# Altium PCB PcbDoc_JavierLopezIniesta_RodrigoMoratilla.PcbDoc (part 2 of 2)
Units mm, origin at the board's own origin, x right, y up, seen from the top; angles counter-clockwise.
Board outline 50 x 50 mm, 4 copper layers (Top Layer, Int1 (GND), Int2 (PWR), Bottom Layer), stack 1.369 mm thick; 104 components, 112 nets, 568 pads, 286 vias.
Unrouted connection lines stored in the file: 2.
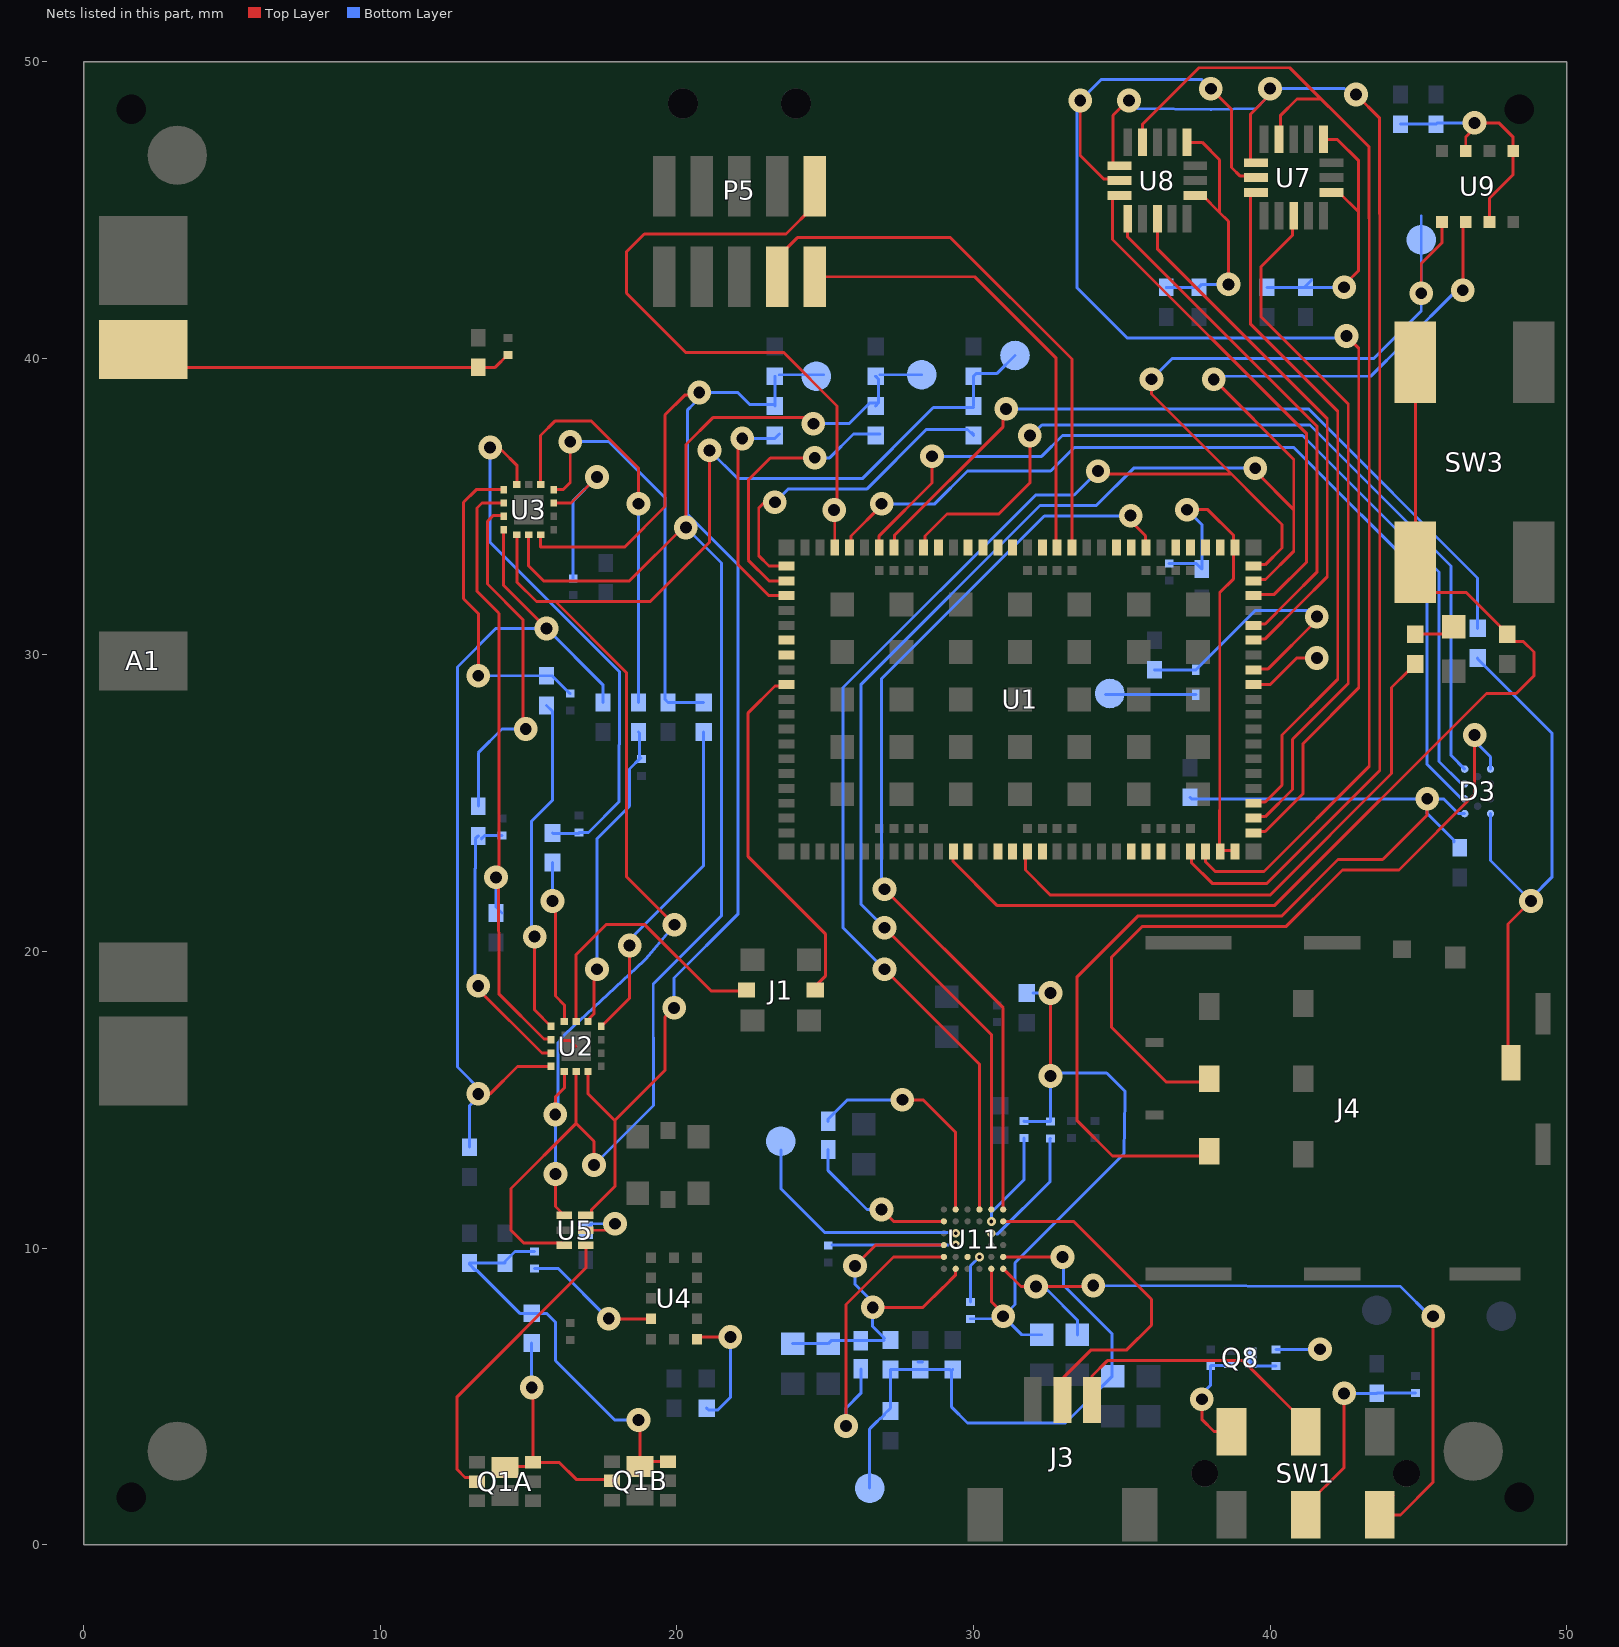
[diagram p4: the nets of this part, all layers, seen from the top]

## Via types
v1: diameter 0.8, hole 0.4, Int2 (PWR) to Bottom Layer, 77 vias
v2: diameter 0.8 (per signal layer), hole 0.4, Top Layer to Int2 (PWR), 59 vias
v3: diameter 0.8, hole 0.4, Top Layer to Int1 (GND), 56 vias
v4: diameter 0.8, hole 0.4, Int1 (GND) to Bottom Layer, 53 vias
v5: diameter 0.8, hole 0.4, Top Layer to Int2 (PWR), 18 vias
v6: diameter 0.3, hole 0.13, Top Layer to Bottom Layer, 10 vias
v7: diameter 0.8, hole 0.4, Top Layer to Bottom Layer, 8 vias
v8: diameter 0.5, hole 0.2, Top Layer to Bottom Layer, 2 vias
v9: diameter 0.8 (per signal layer), hole 0.4, Int1 (GND) to Bottom Layer, 2 vias
v10: diameter 0.3, hole 0.12, Top Layer to Bottom Layer, 1 vias

## Nets (pads, with @x,y where several pads share a name; then routed paths per layer and width w, separated by ;. In a path a pad name is that pad's centre, name@x,y a point inside that pad or via, vN(x,y) a via of type N, cw(c..) or ccw(c..) an arc to the next point about the centre after c; other vN are vias at no path point) (continued)
LTE_RF: J1.1 U2.13 | length 9.2
  Top Layer w0.1: U2.13@16.6,17.645 16.6,18.399 16.6,19.9 17.604,20.904 18.917,20.904 21.146,18.675 J1.1@22.19,18.675
M\R\: R34.1 U11.E4 | length 1.6
  Bottom Layer w0.1: R34.1@29.9,8.185 29.9,9.4 v6(30.2,9.7)
NetA1_2: A1.2 C15.1 L8.2 | length 12.7
  Top Layer w0.1: A1.2@2,40.3 2.6,39.7 12.2,39.7 C15.1@13.3,39.7 13.87,39.7 14.285,40.115 L8.2@14.3,40.115
NetC1_1:  | length 0.5
  Top Layer w0.1: 16.174,17.004 16.396,17.004 16.6,16.8
NetC3_2: C3.2 D1.1 U1.13 | length 9.5
  Top Layer w0.1: U1.13@39.42,29.52 39.92,29.52 41.58,31.18 v7(41.58,31.294)
  Bottom Layer w0.1: C3.2@36.1,29.5 D1.1@37.5,29.5 39.5,31.5 41.586,31.5 41.58,31.494 v7(41.58,31.294)
NetD1_2: D1.2 TP1.1 | length 3
  Bottom Layer w0.1: TP1.1@34.45,28.66 D1.2@37.5,28.66
NetD2_2: D2.2 R11.1 | length 1.2
  Top Layer w0.1: R11.1@44.9,30.7 45.95,30.7 D2.2@46.075,30.825
NetD3_C4: D3.C4 J4.DSW R38.2 | length 18.2
  Top Layer w0.1: J4.DSW@48.025,16.855 48.025,20.925 v2(48.8,21.7)
  Bottom Layer w0.1: R38.2@47,29.9 47,29.875 49.504,27.371 49.504,22.504 48.8,21.8 v2(48.8,21.7) 47.435,23.065 D3.C4@47.435,24.65
  other v1: 48.8,21.7
NetL2_1: L2.1 U4.12 | length 4.5
  Top Layer w0.1: v1(17.7,7.619) 17.719,7.6 U4.12@18.988,7.6 ; U4.12@19.113,7.629 U4.12@19.125,7.617
  Bottom Layer w0.1: L2.1@15.2,9.315 15.985,9.315 17.681,7.619 v1(17.7,7.619)
  other v2: 17.7,7.619
NetQ1A_2: Q1A.2 U5.4 | length 10.2
  Top Layer w0.1: Q1A.2@13.255,2.125 13.119,2.261 12.854,2.261 12.587,2.528 12.587,4.987 16.925,9.325 U5.4@16.925,10.1
NetQ1A_6: Q1A.6 Q1B.2 R8.2 | length 8
  Top Layer w0.1: Q1A.6@14.2,2.6 14.239,2.639 15.009,2.639 Q1A.6@15.145,2.775 ; v1(15.1,5.3) 15.141,5.259 15.141,3.39 15.145,3.386 Q1A.6@15.145,2.775 ; Q1B.2@17.81,2.15 17.76,2.2 16.6,2.2 16.025,2.775 Q1A.6@15.145,2.775
  Bottom Layer w0.1: v1(15.1,5.3) 15.1,5.6 R8.2@15.1,6.8
  other v2: 15.1,5.3
NetQ8_1: Q8.1 R48.2 SW1.4 | length 3.8
  Top Layer w0.1: v5(37.7,4.9) 37.7,4.225 38.109,3.816 38.684,3.816 SW1.4@38.7,3.8
  Bottom Layer w0.1: v5(37.7,4.9) 37.7,5.078 38,5.378 R48.2@38,6.015 38.03,6.045 38.62,6.045 Q8.1@38.65,6.075
  other v1: 37.7,4.9
NetQ8_3: Q8.3 R47.1 | length 1
  Bottom Layer w0.1: Q8.3@39.35,6.3 39.35,6.165 39.5,6.015 R47.1@40.2,6.015
NetR1_1: R1.1 U1.55 | length 7.7
  Top Layer w0.1: v1(22.2,37.3) 22.05,37.15 22.05,33.049 23.099,32 U1.55@23.7,32
  Bottom Layer w0.1: v1(22.2,37.3) 23.3,37.3 R1.1@23.45,37.45
  other v5: 22.2,37.3
NetR2_1: R2.1 U1.54 | length 9.4
  Top Layer w0.1: U1.54@23.7,32.5 23.1,32.5 22.404,33.196 22.404,35.904 23.146,36.646 24.642,36.646 v1(24.646,36.65)
  Bottom Layer w0.1: v1(24.646,36.65) 25.151,36.65 25.951,37.45 R2.1@26.85,37.45
  other v5: 24.646,36.65
NetR3_1: R3.1 U1.53 | length 11.2
  Top Layer w0.1: v1(23.3,35.15) 22.95,35.15 22.758,34.958 22.758,33.343 23.101,33 U1.53@23.7,33
  Bottom Layer w0.1: v1(23.3,35.15) 23.742,35.592 26.398,35.592 28.406,37.6 29.8,37.6 R3.1@30,37.4 ; R3.1@29.948,37.502 29.977,37.473 R3.1@30,37.45
  other v5: 23.3,35.15
NetR7_2: R7.2 U4.3 | length 4.2
  Top Layer w0.1: U4.3@20.675,6.925 20.683,6.917 20.766,7 v1(21.8,7)
  Bottom Layer w0.1: R7.2@21,4.6 21.063,4.537 21.375,4.537 21.8,4.962 v1(21.8,7)
  other v5: 21.8,7
NetU1_2: U1.2 U7.7 U8.7 | length 47
  Top Layer w0.1: v2(33.6,48.7) 33.6,46.845 34.399,46.046 34.879,46.046 U8.7@34.925,46 ; v1(38.004,49.096) 38.008,49.096 38.702,48.402 38.702,46.443 38.999,46.146 39.479,46.146 U7.7@39.525,46.1 ; U1.2@39.44,24 39.486,24.046 39.837,24.046 41.108,25.317 41.108,27.008 42.992,28.892 42.992,40.346 v5(42.579,40.759)
  Bottom Layer w0.1: v1(38.004,49.096) 37.7,49.4 34.3,49.4 v2(33.6,48.7) 33.496,48.596 33.496,42.374 35.174,40.696 42.517,40.696 v5(42.579,40.759)
  other v1: 42.579,40.759 33.6,48.7
  other v2: 38.004,49.096
nRF91_SWDCLK: P5.4 U1.33 | length 18.9
  Top Layer w0.1: P5.4@23.375,42.755 23.375,43.39 24.059,44.074 25.922,44.074 29.227,44.074 33.32,39.981 33.32,33.66 U1.33@33.3,33.64
nRF91_SWDIO: P5.2 U1.34 | length 15.8
  Top Layer w0.1: P5.2@24.645,42.755 30.045,42.755 32.774,40.026 32.774,36.729 32.774,33.97 U1.34@32.774,33.466
P0.00: U1.95
P0.01: U1.96
P0.02: U1.97
P0.03: U1.99 U7.6 U8.6 | length 45.5
  Top Layer w0.1: U8.6@34.925,46.5 34.8,46.5 34.7,46.6 34.7,48.2 35.196,48.696 v1(35.243,48.696) ; U1.99@37.346,23.384 37.346,23.003 38.049,22.3 39.897,22.3 43.7,26.103 43.7,44.87 43.696,44.874 43.696,48.104 v1(42.9,48.9) ; U7.6@39.525,46.6 39.446,46.6 39.346,46.7 39.346,48.246 40,48.9 v2(40,49.1)
  Bottom Layer w0.1: v1(35.243,48.696) 35.511,48.428 35.551,48.427 37.994,48.392 ccw(c38.004,49.096) 38.02,48.392 39.525,48.425 40,48.9 v2(40,49.1) 42.511,49.1 42.711,48.9 v1(42.9,48.9)
  other v1: 40,49.1
  other v2: 35.243,48.696
  other v5: 42.9,48.9
P0.04: U1.100 U7.4 U8.4 | length 40.9
  Top Layer w0.1: U8.4@35.7,47.287 35.7,47.9 37.604,49.804 40.666,49.804 43.342,47.128 43.342,44.727 43.346,44.723 43.346,26.25 39.796,22.7 38.15,22.7 37.816,23.034 U1.100@37.816,23.414 ; U7.4@40.3,47.387 40.346,47.433 40.346,48.187 40.909,48.75 41.674,48.75
P0.06: U1.3 U7.11 | length 23.5
  Top Layer w0.1: U1.3@39.44,24.5 39.486,24.546 39.837,24.546 40.754,25.463 40.754,27.155 42.638,29.039 42.638,38.462 39.7,41.4 39.7,43.1 40.754,44.154 40.754,44.767 U7.11@40.8,44.812
P0.07: U1.4 U7.8 | length 23.3
  Top Layer w0.1: U1.4@39.44,25 39.486,25.046 39.836,25.046 40.4,25.61 40.4,27.301 42.284,29.185 42.284,38.216 39.346,41.154 39.346,45.5 39.446,45.6 U7.8@39.525,45.6
P0.08: U1.15 U8.11 | length 17.8
  Top Layer w0.1: U8.11@36.2,44.712 36.2,43.7 41.93,37.97 41.93,32.639 40.996,31.705 39.837,30.546 39.486,30.546 U1.15@39.44,30.5
P0.09: U1.16 U8.9 | length 17.4
  Top Layer w0.1: U8.9@35.2,44.712 35.2,44.1 41.576,37.724 41.576,32.786 40.642,31.852 39.836,31.046 39.486,31.046 U1.16@39.44,31
P0.10: U1.18 U8.8 | length 17.3
  Top Layer w0.1: U8.8@34.75,45.45 34.741,45.45 34.691,45.4 34.691,44.009 41.222,37.478 41.222,33.122 40.146,32.046 39.486,32.046 U1.18@39.44,32
P0.11: U1.19 U9.3 U11.A5 | length 58.5
  Top Layer w0.1: v2(27,20.8) 30.6,17.2 U11.A5@30.6,11.3 ; v5(38.1,39.296) 40.8,36.596 40.8,34.9 ; U1.19@39.44,32.5 39.486,32.546 39.846,32.546 40.8,33.5 40.8,34.9 ; v1(39.5,36.296) 39.5,36.2 40.8,34.9 ; v2(46.5,42.3) 46.5,44.5 U9.3@46.6,44.6
  Bottom Layer w0.1: v2(27,20.8) 26.2,21.6 26.2,28.999 32.242,35.041 34.141,35.041 35.4,36.3 39.496,36.3 v1(39.5,36.296) ; v5(38.1,39.296) 38.204,39.4 43.4,39.4 44.5,40.5 46.3,42.3 v2(46.5,42.3)
  other v1: 27,20.8 38.1,39.296 46.5,42.3
  other v2: 39.5,36.296
P0.12: TP9.1 U1.20 U9.4 U11.A4 | length 60.3
  Top Layer w0.1: v2(27,19.4) 30.2,16.2 U11.A4@30.2,11.3 ; v1(34.2,36.2) 34.3,36.1 38.7,36.1 ; v1(36,39.3) 36,38.8 38.7,36.1 ; U1.20@39.44,33 39.486,33.046 39.836,33.046 40.4,33.61 40.4,34.4 39.69,35.11 38.7,36.1 ; v2(45.1,42.2) 45.1,43.2 45.8,43.9 U9.4@45.8,44.6
  Bottom Layer w0.1: v2(27,19.4) 25.6,20.8 25.6,28.9 32.096,35.395 33.395,35.395 v1(34.2,36.2) ; v1(36,39.3) 36.7,40 43.499,40 45.1,41.601 v2(45.1,42.2) 45.1,43.2 45.1,44.8
  other v1: 27,19.4 45.1,42.2
  other v5: 34.2,36.2 36,39.3
P0.13/AIN0: U1.23
P0.14/AIN1: U1.24
P0.15/AIN2: U1.25
P0.16/AIN3: U1.26
P0.17/AIN4: U1.28 U11.A6 | length 31.5
  Top Layer w0.1: v2(27,22.1) 31,18.1 U11.A6@31,11.3 ; v7(35.3,34.7) 35.3,34.519 35.8,34.019 U1.28@35.8,33.64
  Bottom Layer w0.1: v2(27,22.1) 26.9,22.2 26.9,29.199 32.389,34.687 35.288,34.687 v7(35.3,34.7)
  other v1: 27,22.1
P0.18/AIN5: U1.29
P0.19/AIN6: U1.30
P0.20/AIN7: U1.35
P0.21: U1.37
P0.22: U1.38
P0.23: U1.39
P0.24: U1.40
P0.25: U1.42
P0.26: R12.2 SW3.1 U1.83 | length 37
  Top Layer w0.1: U1.83@29.316,23.414 29.316,23.034 30.804,21.546 40.144,21.546 47.298,28.7 48.3,28.7 48.9,29.3 48.9,30.1 48.55,30.45 48.225,30.45 48,30.675 R12.2@48,30.7 48,30.725 46.625,32.1 45.245,32.1 44.9,32.445 SW3.1@44.9,33.125 SW3.1@44.9,39.875
P0.27: U1.84
P0.28: U1.86
P0.29: U1.87
P0.30: R11.2 U1.88 | length 19.1
  Top Layer w0.1: U1.88@31.75,23.44 31.75,22.75 32.6,21.9 39.997,21.9 44.1,26.003 44.1,28.9 44.65,29.45 44.675,29.45 44.9,29.675 R11.2@44.9,29.7
P0.31: U1.89
PGOOD1: R27.2 U11.B5 | length 3.3
  Bottom Layer w0.1: v6(30.6,10.9) 30.6,11.2 31.7,12.3 R27.2@31.7,13.715
PGOOD2: R28.2 U11.C5 | length 4
  Bottom Layer w0.1: 30.77,10.479 30.821,10.479 32.572,12.23 32.572,13.672 R28.2@32.6,13.7
  other v6: 30.6,10.5
R\E\S\E\T\: U11.E3
RF: J1.3 U1.61 | length 12.4
  Top Layer w0.1: U1.61@23.7,29 23.654,28.954 23.304,28.954 22.4,28.05 22.4,23.199 25.004,20.595 25.004,19.169 J1.3@24.51,18.675
RF_SW1: R1.2 R6.2 TP3.1 U2.7 U3.7 U5.6 | length 47.8
  Top Layer w0.1: U3.7@15.4,34.055 15.4,33.636 18.232,33.636 19.6,35.004 19.6,38.1 20.261,38.761 20.661,38.761 v1(20.75,38.85) ; U5.6@16.925,11.1 17.05,11.1 17.125,11.175 17.125,11.3 17.904,12.079 17.904,14.296 17.9,14.3 ; U2.7@17,15.955 17,15.2 17.9,14.3 ; v1(19.904,18.1) 19.9,18.1 19.596,17.796 19.596,15.996 17.9,14.3
  Bottom Layer w0.1: v1(19.904,18.1) 19.9,18.128 19.9,19.104 22.05,21.254 22.05,33.051 20.35,34.751 20.35,34.875 ccw(c19.65,34.95) 20.35,35.025 20.35,38.25 20.561,38.461 20.561,38.472 20.75,38.661 v1(20.75,38.85) 22.05,38.85 22.45,38.45 R1.2@23.3,38.45 ; R1.2@23.3,38.4 R1.2@23.3,38.45 ; R6.2@23.3,39.4 R1.2@23.3,38.45 ; R6.2@23.45,39.45 TP3.1@24.95,39.45
  other v2: 19.904,18.1 20.75,38.85
RF_SW2: R2.2 R5.2 TP10.1 U2.6 U3.6 U5.3 | length 53.5
  Top Layer w0.1: U3.6@15,34.055 15,33 15.5,32.5 18.4,32.5 20.2,34.3 v2(20.3,34.3) 20.3,37.096 21.208,38.004 24.396,38.004 v2(24.6,37.8) ; U5.3@16.2,10.1 16.129,10.171 14.829,10.171 14.4,10.6 14.4,12.004 16.6,14.204 ; U2.6@16.6,15.955 16.6,14.204 ; v2(17.2,12.8) 17.2,13.6 16.6,14.2 16.6,14.204
  Bottom Layer w0.1: v2(17.2,12.8) 19.204,14.804 19.204,17.092 19.2,17.096 19.2,18.904 21.5,21.204 21.5,33.1 v2(20.3,34.3) ; v2(24.6,37.8) 25.8,37.8 26.5,38.5 R2.2@26.8,38.5 ; R2.2@26.7,38.4 R2.2@26.8,38.5 ; R5.2@26.7,39.4 26.8,39.3 R2.2@26.8,38.5 ; R5.2@26.85,39.45 TP10.1@28.25,39.45
  other v1: 17.2,12.8 20.3,34.3 24.6,37.8
RF_SW3: R3.2 R4.2 TP2.1 U2.5 U3.5 U5.1 | length 51
  Top Layer w0.1: U3.5@14.6,34.055 14.6,33.79 14.6,33.7 14.6,32.459 15.259,31.8 15.9,31.8 ; v2(15.896,14.5) 15.896,15.096 16.2,15.4 16.2,15.69 U2.5@16.2,15.955 ; v2(15.9,12.5) 15.9,11.4 U5.1@16.2,11.1 ; v2(19.917,20.9) 18.296,22.521 18.296,29.404 15.9,31.8 ; v2(21.1,36.9) 21.1,33.8 19.1,31.8 15.9,31.8
  Bottom Layer w0.1: v2(15.9,12.5) 15.9,14.496 v2(15.896,14.5) 15.987,14.591 15.987,16.929 16.174,17.154 cw(c16.6,16.8) 16.223,17.206 18.884,19.685 ccw(c18.404,20.2) 18.942,19.746 v2(19.917,20.9) ; v2(21.1,36.9) 22.054,35.946 26.251,35.946 27.279,36.974 27.279,36.98 28.644,38.345 R3.2@30,38.345 ; R3.2@30,38.4 R4.2@30,39.4 30.1,39.5 30.8,39.5 TP2.1@31.4,40.1
  other v1: 15.9,12.5 15.896,14.5 19.917,20.9 21.1,36.9
RST_1: D3.C1 J4.C2 | length 24.1
  Top Layer w0.1: J4.C2@37.9,15.605 37.895,15.6 36.496,15.6 34.646,17.45 34.646,19.801 35.683,20.838 40.532,20.838 42.44,22.746 44.346,22.746 46.899,25.299 v1(46.899,27.3)
  Bottom Layer w0.1: v1@46.9,27.1 47.435,26.565 D3.C1@47.435,26.15
  other v5: 46.899,27.3
SCIM_IO: D3.A3 U1.48 | length 30.9
  Top Layer w0.1: U1.48@25.82,33.62 25.866,33.666 25.866,34.016 26.902,35.052 v7(26.902,35.098)
  Bottom Layer w0.1: v7(26.902,35.098) 28.693,35.098 29.799,36.204 32.604,36.204 33.4,37 40.8,37 45.3,32.5 45.3,26.308 46.429,25.179 46.536,25.179 D3.A3@46.565,25.15
SCLK: U1.58
SDATA: U1.59
SIM_1V8: C4.2 C8.2 C46.2 C47.2 C54.2 D3.A4 J4.C1 L13.2 P5.1 R25.1 R47.2 U1.12 U1.49 U5.5 U11.D1 U11.F2 | length 76.9
  Top Layer w0.1: U5.5@16.925,10.6 17.6,10.6 17.819,10.819 v1(17.911,10.819) ; P5.1@24.645,45.805 24.645,45.17 23.675,44.2 18.9,44.2 18.3,43.6 18.3,42.2 18.68,41.82 18.68,41.816 20.295,40.2 23.6,40.2 25.4,38.4 25.4,34.988 v5(25.3,34.888) 25.32,34.868 U1.49@25.32,33.62 ; v4(26,9.4) 26.7,10.1 U11.D1@28.915,10.1 ; v2(26.6,8) 28.3,8 28.981,8.681 28.986,8.681 29.4,9.096 U11.F2@29.4,9.215 ; J4.C1@37.761,13.1 34.685,13.1 33.496,14.289 33.496,19.152 35.536,21.192 40.386,21.192 42.294,23.1 43.8,23.1 45.3,24.6 v7(45.3,25.15) ; U1.12@39.44,29 40,29 40.9,29.9 v5(41.58,29.9)
  Bottom Layer w0.1: C8.2@16.925,10.6 16.925,10.619 17.125,10.819 v1(17.911,10.819) ; C46.2@23.9,6.775 C47.2@25.1,6.775 25.2,6.875 L13.2@26.2,6.875 26.975,6.875 26.948,6.902 27,6.954 26.6,7.354 v2(26.6,8) 26.6,8.178 26,8.778 v4(26,9.4) ; C4.2@37.3,25.2 37.35,25.15 v7(45.3,25.15) ; R47.2@40.2,6.585 v1(41.685,6.585) ; C54.2@46.2,23.7 46.2,23.75 45.3,24.65 v7(45.3,25.15) ; D3.A4@46.565,24.65 46.35,24.65 45.85,25.15 v7(45.3,25.15)
  other v1: 26.6,8
  other v3: 26,9.4
  other v5: 17.911,10.819
SIM_CLK: D3.A2 U1.46 | length 30.7
  Top Layer w0.1: U1.46@26.82,33.62 26.82,34.02 28.6,35.8 v7(28.6,36.7)
  Bottom Layer w0.1: v7(28.6,36.7) 32.3,36.7 33,37.4 41.1,37.4 41.2,37.3 45.7,32.8 45.7,26.408 46.43,25.679 46.536,25.679 D3.A2@46.565,25.65
SIM_DET: R38.1 U1.45 | length 26.2
  Top Layer w0.1: U1.45@27.32,33.62 27.34,33.64 27.34,34.039 31,37.699 31,38.2 v2(31.1,38.3)
  Bottom Layer w0.1: v2(31.1,38.3) 41.3,38.3 47,32.6 R38.1@47,30.9
  other v1: 31.1,38.3
SIM_RST: D3.A1 U1.43 | length 29.8
  Top Layer w0.1: U1.43@28.32,33.62 28.366,33.666 28.366,34.016 29.104,34.754 30.854,34.754 31.9,35.8 31.9,37.3 v5@31.9,37.59
  Bottom Layer w0.1: v1(31.9,37.404) 31.952,37.404 32.302,37.754 41.345,37.754 46.1,32.999 46.1,26.615 D3.A1@46.565,26.15
  other v5: 31.9,37.404
STP: TP5.1 U11.C2 | length 7.7
  Bottom Layer w0.1: TP5.1@23.5,13.3 23.5,12.004 24.98,10.524 29.291,10.524 v6@29.315,10.5
  other v6: 29.4,10.5
SW1: L13.1 U11.E1 | length 10.2
  Top Layer w0.1: v7(25.7,4) 25.7,8.096 27.304,9.7 U11.E1@28.915,9.7 ; U11.E1@28.949,9.691 28.958,9.7 U11.E1@29,9.7
  Bottom Layer w0.1: v7(25.7,4) 25.7,4.6 26.2,5.1 L13.1@26.2,5.925
SW2A: L14.1 U11.B1 | length 5.6
  Top Layer w0.1: v2(26.9,11.3) 27.3,10.9 U11.B1@29,10.9
  Bottom Layer w0.1: L14.1@25.1,13.325 25.1,12.608 26.408,11.3 v2(26.9,11.3) v1@26.9,11.6
  other v1: 26.9,11.3
SW2B: L14.2 U11.A2 | length 7.6
  Top Layer w0.1: v2(27.6,15) 28.299,15 29.4,13.899 U11.A2@29.4,11.385
  Bottom Layer w0.1: L14.2@25.1,14.275 25.1,14.35 25.75,15 v2(27.6,15)
  other v1: 27.6,15
T1A: L7.2 R10.2 U3.14 | length 18.3
  Top Layer w0.1: v2(13.7,37) 13.8,36.9 14.1,36.9 14.6,36.4 14.6,36.01 U3.14@14.6,35.745
  Bottom Layer w0.1: v2(13.7,37) 13.7,33.796 18.054,29.442 18.054,26.974 18.046,26.966 18.046,25.047 17.014,24.015 L7.2@16.715,24.015 ; R10.2@15.8,24 15.815,23.985 16.7,23.985 16.7,24 L7.2@16.715,24.015 ; L7.2@16.7,24.015 L7.2@16.715,24.015
  other v1: 13.7,37
T1F: R10.1 U2.14 | length 5.5
  Top Layer w0.1: v1(15.801,21.7) 15.904,21.597 15.904,18.496 16.2,18.2 16.2,17.89 U2.14@16.2,17.645
  Bottom Layer w0.1: v1(15.801,21.7) R10.1@15.801,22.999
  other v2: 15.801,21.7
T2A: C10.2 L6.2 U3.1 | length 10.9
  Top Layer w0.1: v2(13.3,29.3) 13.3,31.4 12.8,31.9 12.8,35.147 13.228,35.575 U3.1@14.155,35.575
  Bottom Layer w0.1: v2(13.3,29.3) 15.3,29.3 15.785,29.3 16.385,28.7 L6.2@16.4,28.7
  other v1: 13.3,29.3
T2F: C10.1 U2.1 | length 11.5
  Top Layer w0.1: v2(15.2,20.5) 15.2,18.03 U2.1@15.755,17.475
  Bottom Layer w0.1: v2(15.2,20.5) 15.097,20.603 15.097,24.397 15.8,25.1 15.8,28.1 C10.1@15.6,28.3
  other v1: 15.2,20.5
T3A: C12.2 U2.2 U3.2 | length 21.4
  Top Layer w0.1: U3.2@14.155,35.125 13.425,35.125 13.254,34.954 13.254,32.146 13.971,31.429 14,31.4 14,29.375 cw(c13.3,29.3) 14,29.225 14,22.755 13.9,22.655 v2(13.9,22.5) 13.947,22.453 13.977,22.424 14,18.916 14.004,18.912 14.004,18.556 15.514,17.046 15.734,17.046 U2.2@15.755,17.025
  Bottom Layer w0.1: v2(13.9,22.5) 13.9,21.5 C12.2@14.1,21.3
  other v1: 13.9,22.5
T4A: C9.2 U3.3 | length 11.9
  Top Layer w0.1: U3.3@14.155,34.675 14.134,34.696 13.904,34.696 13.9,34.7 13.8,34.7 13.608,34.508 13.608,32.391 14.8,31.199 14.8,27.6 v2(14.9,27.5)
  Bottom Layer w0.1: C9.2@13.3,24.9 13.3,26.7 14.1,27.5 v2(14.9,27.5)
  other v1: 14.9,27.5
T4F: C9.1 L4.2 U2.3 | length 9.4
  Top Layer w0.1: v2(13.3,18.841) 13.3,18.8 13.3,18.719 15.444,16.575 U2.3@15.755,16.575
  Bottom Layer w0.1: v2(13.3,18.841) 13.196,18.945 13.196,22.792 13.2,22.796 13.2,23.8 C9.1@13.3,23.9 ; C9.1@13.4,23.8 13.515,23.915 L4.2@14.1,23.915
  other v1: 13.3,18.841
T5A: C11.2 U3.12 | length 13.7
  Top Layer w0.1: U3.12@15.4,35.745 15.4,37.4 15.896,37.896 17.104,37.896 18.7,36.3 v2(18.7,35.1)
  Bottom Layer w0.1: C11.2@18.7,28.4 v2(18.7,35.1)
  other v1: 18.7,35.1
T5F: C11.1 L5.2 U2.12 | length 10.5
  Top Layer w0.1: U2.12@17.029,17.729 17.2,17.9 17.2,19.296 v1(17.304,19.4)
  Bottom Layer w0.1: v1(17.304,19.4) 17.304,23.804 18.4,24.9 18.4,26.152 18.78,26.533 18.738,26.533 18.738,27.362 C11.1@18.7,27.4
  other v2: 17.304,19.4
T6A: C14.2 R9.2 U3.11 | length 14.2
  Top Layer w0.1: U3.11@15.845,35.575 16.156,35.575 16.4,35.819 v1(16.4,37.192)
  Bottom Layer w0.1: v1(16.4,37.192) 16.408,37.2 17.7,37.2 19.596,35.304 19.596,28.504 C14.2@19.7,28.4 R9.2@20.9,28.4
  other v2: 16.4,37.192
T6F: R9.1 U2.11 | length 11.4
  Top Layer w0.1: U2.11@17.445,17.475 18.404,18.434 v2(18.404,20.2)
  Bottom Layer w0.1: v2(18.404,20.2) 18.404,20.389 18.591,20.576 18.591,20.591 20.9,22.9 R9.1@20.9,27.4
  other v1: 18.404,20.2
T7A: L3.2 U3.10 | length 5.6
  Top Layer w0.1: U3.10@15.845,35.125 16.425,35.125 v2(17.3,36)
  Bottom Layer w0.1: L3.2@16.5,32.585 16.5,35.2 v2(17.3,36)
  other v1: 17.3,36
THR: J3.2 U11.B6 | length 11.5
  Top Layer w0.1: U11.B6@31,10.9 33.37,10.9 35.358,8.912 36,8.27 36,7.4 35.154,6.554 33.954,6.554 33.041,5.641 J3.2@33.041,4.816
VBUS: C53.2 SW1.3 U11.F6 | length 26.9
  Top Layer w0.1: U11.F6@31,9.3 31.6,8.7 v1(32.104,8.7) 34,8.7 v1(34.037,8.737) ; SW1.3@44.15,1.646 43.7,1.196 SW1.3@43.7,1 44.4,1 45.5,2.1 v2(45.5,7.7) 45.5,7.008
  Bottom Layer w0.1: v1(32.104,8.7) 32.238,8.566 32.509,8.566 33.5,7.575 C53.2@33.5,7.075 ; v1(34.037,8.737) 44.4,8.7 44.429,8.671 45.4,7.7 v2(45.5,7.7)
  other v1: 45.5,7.7
  other v2: 32.104,8.7 34.037,8.737
VBUS': C43.2 C44.2 SW1.2 | length 7
  Top Layer w0.1: SW1.2@41.2,1 41.2,1.3 42.5,2.6 v1(42.5,5.1)
  Bottom Layer w0.1: v1(42.5,5.1) C43.2@43.6,5.1 43.615,5.115 C44.2@44.9,5.115
  other v2: 42.5,5.1
VDD: C52.2 R27.1 R28.1 R33.2 R34.2 U11.F5 | length 22.3
  Top Layer w0.1: U11.F5@30.6,9.215 30.6,8.2 31,7.8 v4(31,7.7) ; v2(32.6,15.8) v2(32.6,18.6)
  Bottom Layer w0.1: R34.2@29.9,7.615 30.915,7.615 v4(31,7.7) ; R27.1@31.7,14.285 31.7,14.27 R28.1@32.6,14.27 ; R33.2@32,18.6 v2(32.6,18.6) ; C52.2@32.3,7.075 31.625,7.075 v4(31,7.7) ; R28.1@32.6,14.3 v2(32.6,15.8) 32.704,15.904 34.492,15.904 35.108,15.288 35.108,15.037 35.072,13.211 cw(c34.972,13.213) 35.042,13.142 33.954,12.054 31.4,9.501 31.4,8.1 v4(31,7.7)
  other v1: 32.6,15.8 32.6,18.6
  other v7: 31,7.7
VDD_ADXL362: C38.2 C39.2 U8.1 U8.14 | length 8.9
  Top Layer w0.1: U8.1@37.2,47.287 37.713,47.287 38.3,46.7 38.3,44.925 ; U8.14@37.475,45.5 37.725,45.5 38.3,44.925 ; v2(38.6,42.5) 38.6,44.625 38.3,44.925
  Bottom Layer w0.1: C39.2@36.5,42.4 C38.2@37.6,42.4 37.7,42.5 v2(38.6,42.5)
  other v1: 38.6,42.5
VDD_ADXL372: C36.2 C37.2 U7.1 U7.14 | length 10.5
  Top Layer w0.1: U7.1@41.8,47.387 42.267,47.387 42.988,46.667 42.988,44.937 ; U7.14@42.175,45.5 U7.14@42.075,45.6 42.325,45.6 42.988,44.937 ; v2(42.5,42.4) 42.611,42.289 42.547,42.527 42.988,42.968 42.988,44.937
  Bottom Layer w0.1: C37.2@39.9,42.4 C36.2@41.2,42.4 ; C36.2@41.2,42.45 C36.2@41.2,42.4 ; C36.2@41.4,42.639 41.2,42.439 C36.2@41.2,42.4 ; v2(42.5,42.4) C36.2@41.2,42.4
  other v1: 42.5,42.4
VDD_BME: C40.2 C41.2 U9.2 U9.6 U9.8 | length 8.3
  Top Layer w0.1: U9.6@46.6,47 46.6,47.464 46.896,47.76 v2(46.896,47.946) 47.717,47.946 48.2,47.463 U9.8@48.2,47 48.2,46.2 47.4,45.4 U9.2@47.4,44.6
  Bottom Layer w0.1: C41.2@44.4,47.9 C40.2@45.6,47.9 45.646,47.946 v2(46.896,47.946)
  other v1: 46.896,47.946
VDD_LNA: C5.2 C6.2 L2.2 Q1B.6 R8.1 | length 13.7
  Top Layer w0.1: v2(18.7,4.2) 18.7,4.1 18.759,4.041 18.759,3.959 18.755,3.955 Q1B.6@18.755,2.625 18.93,2.8 Q1B.6@19.7,2.8
  Bottom Layer w0.1: L2.2@15.2,9.885 14.535,9.885 14.2,9.55 C5.2@14.2,9.5 C6.2@13,9.5 13,9.45 13.2,9.25 13.25,9.25 14.7,7.8 R8.1@15.1,7.8 15.6,7.8 15.9,7.5 15.9,6.2 17.9,4.2 v2(18.7,4.2)
  other v1: 18.7,4.2
VDD_nRF91: C1.2 C2.2 U1.22 U1.101 U1.102 | length 16.6
  Top Layer w0.1: v7(37.2,34.9) 37.9,34.9 38.774,34.026 38.774,32.574 38.304,32.104 38.304,24.774 38.3,24.77 U1.101@38.3,23.4 ; U1.101@38.3,23.4 U1.102@38.8,23.4
  Bottom Layer w0.1: C1.2@36.6,33.085 37.515,33.085 C2.2@37.7,32.9 37.7,34.4 v7(37.2,34.9)
VDD_QM: C16.2 C17.2 U2.4 U3.4 | length 30.2
  Top Layer w0.1: v2(13.3,15.2) 13.7,15.2 14.625,16.125 U2.4@15.755,16.125 ; U3.4@14.155,34.225 14.155,32.345 15.596,30.904 v2(15.596,30.896)
  Bottom Layer w0.1: C16.2@13,13.4 13,14.8 13.3,15.1 13.3,15.4 12.729,15.971 12.7,16 12.596,16.104 12.596,29.596 13.9,30.9 15.592,30.9 v2(15.596,30.896) ; v1@15.6,30.9 17.5,29 C17.2@17.5,28.4
  other v1: 13.3,15.2 15.596,30.896
VID1: R26.2 U11.D2 | length 4.2
  Bottom Layer w0.1: R26.2@25.234,10.104 v6@29.396,10.104
  other v6: 29.4,10.1
VLi-Ion': J3.3 SW1.5 | length 9.1
  Top Layer w0.1: J3.3@34.041,5.183 34,5.224 34,5.688 34.513,6.2 39.1,6.2 41.2,4.1 SW1.5@41.2,3.8
VSYS: C51.2 R25.2 R29.1 R30.1 R31.2 TP7.1 U11.E6 | length 20.7
  Top Layer w0.1: U11.E6@31.085,9.7 v1(33,9.7)
  Bottom Layer w0.1: TP7.1@26.5,1.9 26.5,3.9 26.521,3.921 26.521,3.926 26.699,4.104 26.704,4.104 26.85,4.25 26.875,4.25 27,4.375 27,4.4 27.2,4.6 R25.2@27.2,5.9 R30.1@28.2,5.9 29.2,5.9 R29.1@29.25,5.85 ; R30.1@28.125,6.15 R30.1@28.275,6.15 ; R29.1@29.3,5.9 R29.1@29.25,5.85 ; v1(33,9.7) 33.038,9.662 33.038,8.742 33.509,8.271 33.511,8.269 ccw(c34.037,8.737) 33.569,8.211 33.571,8.209 34.671,7.109 C51.2@34.671,5.704 ; C51.2@34.675,5.675 33.1,4.1 29.8,4.1 29.25,4.65 R29.1@29.25,5.85
  other v2: 33,9.7
pads on no net: A1.0 A1.3 A1.4 J3.0 J4.C6 P5.0 P5.6 P5.7 P5.8 P5.10 Q1A.3 Q1A.4 Q1A.5 Q1B.3 Q1B.4 Q1B.5 SW1.0 SW1.1 U1.10 U1.32 U1.51 U1.57 U1.64 U1.70 U1.71 U1.73 U1.91 U1.92 U1.93 U1.104 U1.105 U1.106 U1.107 U1.108 U1.109 U1.110 U1.111 U1.112 U1.113 U1.114 U1.115 U1.116 U1.117 U1.118 U1.119 U1.120 U1.121 U1.122 U1.123 U1.124 U1.125 U1.126 U1.127 U2. U2.8 U2.9 U2.10 U3. U3.8 U3.9 U7.2 U7.3 U7.5 U7.9 U7.10 U7.15 U8.2 U8.3 U8.5 U8.10 U8.15

## Polygon pours and split planes (outlines as drawn)
GND on Int1 (GND) (split plane): 16.398,39.3 16.407,39.202 16.436,39.108 16.482,39.021 16.545,38.945 20.648,34.842 20.648,15.05 20.657,14.952 20.686,14.858 20.732,14.771 20.795,14.695 21.445,14.045 22.298,13.192 22.298,0.51 0.51,0.51 0.51,49.49 16.398,49.49
GND on Int1 (GND) (split plane): 49.49,0.51 23.302,0.51 23.302,13.4 23.293,13.498 23.264,13.592 23.218,13.679 23.155,13.755 22.155,14.755 21.652,15.258 21.652,35.05 21.643,35.148 21.614,35.242 21.568,35.329 21.505,35.405 17.402,39.508 17.402,49.49 49.49,49.49
SIM_1V8 on Int2 (PWR) (split plane): 49.49,0.51 31.402,0.51 31.402,15.7 31.394,15.778 31.377,15.836 31.371,15.854 31.334,15.923 31.284,15.984 29.984,17.284 29.923,17.334 29.854,17.371 29.778,17.394 29.7,17.402 27.9,17.402 27.822,17.394 27.746,17.371 27.677,17.334 27.616,17.284 26.516,16.184 26.466,16.123 26.429,16.054 26.406,15.978 26.398,15.9 26.398,0.51 0.51,0.51 0.51,49.49 49.49,49.49
3V3 on Int2 (PWR) (split plane): 30.598,15.534 30.598,0.51 27.202,0.51 27.202,15.734 28.066,16.598 29.534,16.598

## Other copper
Top Layer:
  region net GND: 42.5,46.8 41.1,46.8 41.1,43.1 42.7,43.1 42.7,44.7 42.1,45.3 41.5,45.3 41.5,46.4 42.5,46.4
  region net VDD_ADXL372: 42.656,45.268 43,45.268 43,44.949 42.988,44.937
  region net GND: 37.9,46.7 36.5,46.7 36.5,43.8 37.3,43 38.4,43 38.4,44.2 37.4,45.2 36.9,45.2 36.9,46.3 37.9,46.3
  region net GND: 32.3,4.1 32.3,6.9 29.9,6.9 29.9,4.1
  region net GND: 47.2,47.2 47.6,47.2 47.6,46.3 46.3,45 44,45 44,47.5 46,47.5 46,46.7 47.2,46.7
  region net GND: 48,44.8 48,31.7 49.6,31.7 49.6,44.8
  region net GND: 21.7,44.8 21.7,47.2 23.8,47.2 23.8,44.8
  region: 20.4,44.8
  region: 21.597,47.35
  region: 21.7,44.8 21.7,47.2
  region net GND: 40.6,19.185 46.845,19.185 46.845,21.155 46.1,21.9 42.678,21.9 40.6,19.822
  region net GND: 38.8,30.2 38.8,29.974 38.913,30.087
  region net GND: 38.8,29.974 38.912,30.086 38.912,29.862 38.823,29.773 38.8,29.75
  region net GND: 38.8,30.2 38.846,30.154 38.846,29.796 38.847,29.796 39.025,29.974
  region: 8.761,8.174 9.167,8.174 9.167,7.97 9.574,7.97 9.574,7.767 9.777,7.767 9.777,7.564 9.98,7.564 9.98,7.361 10.183,7.361 10.183,7.158 10.183,6.954 10.386,6.954 10.386,6.751 10.386,6.548 10.386,6.345 10.386,6.142 10.386,5.938 10.386,5.735 10.386,5.532 10.386,5.329 10.183,5.329 10.183,5.126 10.183,4.922 9.98,4.922 9.98,4.719 9.777,4.719 9.777,4.516 9.574,4.516 9.574,4.313 9.37,4.313 9.37,4.11 8.761,4.11 8.761,3.906 8.761,3.703 8.964,3.703 8.964,3.5 9.167,3.5 9.167,3.297 9.37,3.297 9.37,3.094 9.574,3.094 9.574,2.89 9.777,2.89 9.777,2.687 9.777,2.484 9.98,2.484 9.98,2.281 10.183,2.281 10.183,2.078 10.386,2.078 10.386,1.874 10.59,1.874 10.59,1.671 10.793,1.671 10.793,1.468 10.793,1.265 10.996,1.265 10.996,1.062 11.199,1.062 11.199,0.858 11.402,0.858 11.402,0.655 11.199,0.655 9.37,0.858 9.37,1.062 9.167,1.062 9.167,1.265 8.964,1.265 8.964,1.468 8.761,1.468 8.761,1.671 8.558,1.671 8.558,1.874 8.354,1.874 8.354,2.078 8.354,2.281 8.151,2.281 8.151,2.484 7.948,2.484 7.948,2.687 7.745,2.687 7.745,2.89 7.745,3.094 7.542,3.094 7.542,3.297 7.338,3.297 7.338,3.5 7.135,3.5 7.135,3.703 7.135,3.906 7.135,4.11 7.135,4.313 7.135,4.516 7.135,4.719 7.135,4.922 8.151,4.922 8.151,5.126 8.558,5.126 8.558,5.329 8.761,5.329 8.761,5.532 8.761,5.735 8.761,5.938 8.761,6.142 8.761,6.345 8.761,6.548 8.761,6.751 8.558,6.751 8.558,6.954 8.151,6.954 8.151,7.158 7.135,7.158 7.135,7.361 7.135,7.564 7.135,7.767 7.135,7.97 7.135,8.174 7.135,8.377 8.761,8.377
  region: 6.526,8.174 6.526,7.97 6.526,7.767 6.526,7.564 6.526,7.361 6.526,7.158 6.526,6.954 6.526,6.751 6.526,6.548 6.526,6.345 6.526,6.142 6.526,5.938 6.526,5.735 6.526,5.532 6.526,5.329 6.526,5.126 6.526,4.922 6.526,4.719 6.526,4.516 6.526,4.313 6.526,4.11 6.526,3.906 6.526,3.703 6.526,3.5 6.526,3.297 6.526,3.094 6.526,2.89 6.526,2.687 6.322,2.687 6.322,2.484 6.322,2.281 6.322,2.078 6.322,1.874 6.322,1.671 6.119,1.671 6.119,1.468 6.119,1.265 5.916,1.265 5.916,1.062 5.51,1.062 5.51,0.858 5.103,0.858 5.103,0.655 3.274,0.655 3.274,0.858 2.868,0.858 2.868,1.062 2.462,1.062 2.462,1.265 2.462,1.468 2.462,1.671 2.665,1.671 2.665,1.874 2.665,2.078 2.868,2.078 2.868,2.281 2.868,2.484 3.071,2.484 3.071,2.281 3.478,2.281 3.478,2.078 4.29,2.078 4.29,2.281 4.697,2.281 4.697,2.484 4.697,2.687 4.9,2.687 4.9,2.89 4.9,3.094 4.9,3.297 4.9,3.5 4.9,3.703 4.9,3.906 4.9,4.11 4.9,4.313 4.9,4.516 4.9,4.719 4.9,4.922 4.9,5.126 4.9,5.329 4.9,5.532 4.9,5.735 4.9,5.938 4.9,6.142 4.9,6.345 4.9,6.548 4.9,6.751 4.9,6.954 4.9,7.158 4.9,7.361 4.9,7.564 4.9,7.767 4.9,7.97 4.9,8.174 4.9,8.377 6.526,8.377
  region net GND: 20.374,9.85
  region net GND: 19.6,6.749 20.2,6.749 20.2,7.417 20.925,7.417 20.925,9.775 20.85,9.85 20.374,9.85 20.374,9.2 19.426,9.2 19.426,9.85 18.95,9.85 18.95,8.092 19.007,8.149 19.6,8.149 19.6,6.749 20.2,6.749 20.2,7.417 20.05,7.567
  region net P0.04: 40.9,49.6 40.9,48.759 40.909,48.75 41.674,48.75
  region net P0.12: 37.7,37.1 37.7,36.1 38.7,36.1
  region net GND: 34.703,22.954 35.154,22.503 34.246,22.497
  region: 16.1,16.3 17.1,16.3 16.1,16.3
  region net GND: 24.1,19.9 22.7,19.9 22.7,17.45 24.1,17.45
  region: 27.9,11.7
  region net GND: 38,32.1 38,24.9 25.1,24.9 25.1,32.1
  region net GND: 18.4,13.5 21,13.5 21,12.1 18.4,12.1
  region net GND: 14.6,35.3 15.4,35.3 15.4,34.5 14.6,34.5
  region net GND: 14.6,35.3 15.4,35.3 15.4,34.5 14.6,34.5 14.6,35.3 15.4,35.3 15.4,34.5 14.6,34.5
  region net VDD_ADXL362: 38.025,45.2 38.3,45.2 38.3,44.925
  region net RF_SW2: 16.55,14.2 16.15,13.8 17.05,13.8 16.65,14.2
  region net RF_SW1: 17.45,14.75 17.5,14.7 18.3,14.7 17.9,14.3
  region net RF_SW3: 16.4,31.8 16.4,31.3 15.9,31.8
  text "FEEL 2020" at 1.5,12.59 h1.5
  text "_________________________________________________________________" at 3.6,12.4 h0.1
  text "Javier Lopez Iniesta" at 1.7,11.3 h1
  text "Rodrigo Moratilla" at 1.75,10.357 h1
  text ".print_Date" at 2.05,9.061 h1
Bottom Layer:
  region net GND: 33.9,42.5 33.8,42.5 35.3,41 41.9,41 41.9,41.6 41.8,41.6 41.6,41.6 35.3,41.6
  region net GND: 19.183,27.6 20.3,27.6 20.3,24.2 18.6,24.2 18.6,25.5 19.211,26.111
  region: 13.88,24.532
  region net GND: 13.9,24.3 13.9,26.4 14.4,26.9 15.6,26.9 15.6,25.2 14.7,24.3
  region net GND: 23.3,7.8 25.3,7.8 25.33,7.83 25.33,9.8 24.7,9.8 24.7,10.3 23.3,11.7
  region net GND: 25.1,9.515
  region net GND: 30.965,18.2 30.965,19.035 30.8,19.2 30.785,19.185 30.785,18.2
  region net GND: 28.5,18.2 28.5,18 30.965,18 30.965,18.2
  region net GND: 31.45,19.75
  region net GND: 31.497,19.497 31.7,19.7 31.294,19.7
  region: 28.5,20.1 28.5,19.7 31.7,19.7 32.1,20.1
  region net GND: 28.5,18.2 30.9,18.2 30.9,18.9 31.6,19.6 31.3,19.9 28.5,19.9 28.5,20.1 34.9,26.5 37.8,26.5 37.8,25.9 36.8,25.9 36.8,24.8 31.497,19.497 30.994,20 28.5,20
  region net GND: 29.4,10.9 29.5,11 29.5,12.3 26.9,12.3 26.9,12.15 28.15,10.9
  region: 29.5,12
  region net GND: 25.8,13.2 29.5,13.2 29.5,12 26.3,12 25.8,12.5
  region net GND: 30.9,14.8 30.1,14.8 30.1,16.5 30.4,16.8 31.7,16.8 31.7,14.6 30.1,14.6 30.1,14.8
  region net GND: 32,15.85
  region: 32.1,16.5
  region net GND: 33.6,14.604 33.08,14.604 33.08,14.01 33.07,14 33.3,14
  region: 33.135,14
  region: 33.135,14 34.7,14 34.718,14.018 34.718,15.282 34.4,15.6 33.6,15.6 33.6,14.604 33.496,14.5
  region net GND: 29.9,6.4 29.9,4.6 30.1,4.4 32.944,4.4 34,5.456 34,6.4 31.6,6.4
  region net GND: 19.6,2.7 24.9,2.7 24.9,4.5 25.5,5.1 25.5,5.8 23.5,5.8 23.5,4 20.4,4 20.4,4.9 19.6,4.9
  region: 23.2,6
  region net GND: 34.32,42.5 35.3,42.5 36.2,41.6 35.1,41.6
  region net GND: 19.2,26.1 18.6,26.1 18.6,24.6
  region net GND: 19.6,26
  region net GND: 19.2,26.705 19.2,26.095 19.6,26.095 19.95,26.445 19.95,27.22 19.65,27.22 19.6,27.27
  region: 18.58,25.868
  region net GND: 20.1,26.8
  region net GND: 19.255,27.6 19.255,26.71 20.145,27.6
  region net GND: 16.17,28.415 16.185,28.4 16.8,28.4 16.8,27.9 17.85,27.9 17.85,25.22 16.93,24.3 16.2,24.3
  region net GND: 13.6,12.793 13.6,14 15.1,14 15.1,12.9
  region net GND: 12.7,10.2 15.1,10.2 15.1,12.9 12.725,12.9
  region net GND: 36.3,7.9 38.9,7.9 38.9,6.424 36.3,6.424
  region: 37.2,7.3
  region net GND: 34.207,4.9 36.9,4.9 36.9,3.9 34.2,3.9 34.2,4.887
  region net GND: 37.4,6.424
  region net GND: 37.4,6.453
  region net GND: 39,6.5
  region net GND: 49.2,8.3 49.4,8.3 49.4,5.4 49.047,5.4
  region net GND: 49.2,7.5
  region net GND: 45.8,6.6 47.5,8.3 49.2,8.3 49.2,6.6 49.1,6.6
  region net GND: 45.8,6.6
  region net GND: 43.1,6.8 49.3,6.8 49.3,5.4 44.4,5.4 44.2,5.6 43.1,5.6
  region net GND: 30.3,41 30.3,41.21 30.3,40.2 29.8,40.2 28.8,41.2 29.52,41.92 29.52,41.99
  region net GND: 29.52,42.2 29.52,41.78 30.3,41 30.3,41.42
  region net GND: 22.8,41.3 25.6,41.3 25.6,42.2 29.52,42.2 30.3,40.2 22.8,40.2
  region net GND: 43.925,49.5 43.925,48.6 46.075,48.6 46.075,49.5
  region: 34.6,42.9
  region: 34.6,42.9
  region net GND: 33.85,42.5 34.81,42.5 35.2,42.11 35.2,41.4
  region net GND: 35,41.8 41.9,41.8 41.9,41.6 41.7,41.4 35.2,41.4
  region net GND: 35.6,30.1 37.3,30.1 38.2,31 38.2,32.4 37.3,32.4 36.9,32.8 35.6,32.8
  region: 35.4,32.7
  region: 30,24.8
  region: 28.2,12.5
Int1 (GND) (plane layer: these items are gaps in the copper):
  lines w1: 16.9,49.6 16.9,39.3 21.15,35.05 21.15,15.05 21.8,14.4 22.8,13.4 22.8,0.2
  text "Digital GND" at 26.2,48.633 h0.4
  text "Analogical GND" at 10.3,48.533 h0.4
Int2 (PWR) (plane layer: these items are gaps in the copper):
  lines w0.8: 26.8,0.2 26.8,15.9 27.9,17 29.7,17 31,15.7 31,0.2

## Text inside footprints (layer, text, board x,y; h text height)
J4: Mechanical 15 "NO VIA / NO TRACE" at 46.018,17.507 h0.55 r270; Mechanical 15 "NO VIA / NO TRACE" at 42.716,18.269 h0.55 r270